# Altium PCB MADI_RP2040_PCB_L4.PcbDoc (part 2 of 3)
Units mm, origin at the board's own origin, x right, y up, seen from the top; angles counter-clockwise.
Board outline 30 x 21.59 mm, 4 copper layers (L1, L2 (GND), L3 (GND), L4), stack 1.525 mm thick; 53 components, 53 nets, 278 pads, 170 vias.
Unrouted connection lines stored in the file: 119.
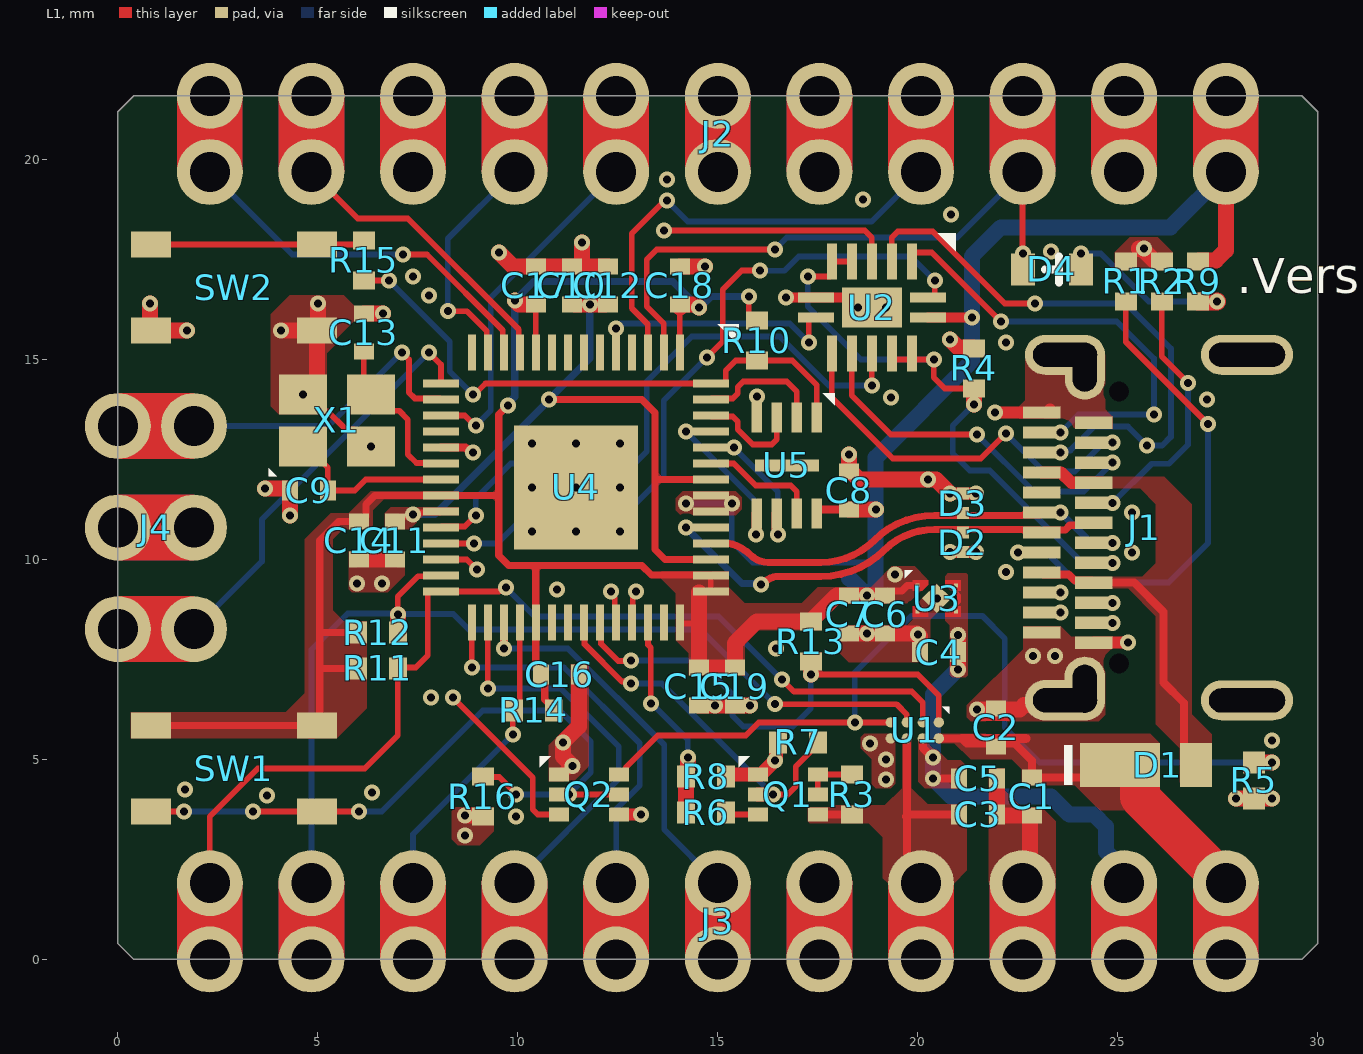
[diagram p0: L1 view]

## Via types
v1: diameter 0.4, hole 0.2, L1 to L4, tented both sides, 161 vias
v2: diameter 0.45, hole 0.2, L1 to L4, tented both sides, 9 vias

## Nets (pads, with @x,y where several pads share a name; then routed paths per layer and width w, separated by ;. In a path a pad name is that pad's centre, name@x,y a point inside that pad or via, vN(x,y) a via of type N, cw(c..) or ccw(c..) an arc to the next point about the centre after c; other vN are vias at no path point) (continued)
+3V3: (continued)
  L1 w0.18: SW1.4@0.825,5.85 SW1.3@4.975,5.85 5.05,5.925 5.05,7.25 ; R11.2@6,7.275 5.075,7.275 5.05,7.25 ; R12.2@6,8.175 5.05,8.175 ; v1(9.75,13.85) 9.525,13.625 9.525,11.625 ; R14.2@10.9,6.225 10.9,6.275 10.675,6.5 10.675,7 10.6,7.075 10.6,7.175 10.45,7.325 U4.33@10.45,8.425 10.45,9.825 10.475,9.85 ; U4.44@14.825,9.6 14.815,9.61 13.34,9.61 13.1,9.85 10.475,9.85 ; C6.2@19.175,9.1 19.285,9.21 19.596,9.21 19.736,9.35 U3.1@19.995,9.35 ; 5.05,7.25 5.05,8.175 ; 5.05,8.175 5.05,10.475 5.525,10.95 C14.2@6.025,10.95 6.075,10.95 6.201,11.077 6.201,11.376 6.425,11.6 U4.22@8.075,11.6 9.5,11.6 9.525,11.625 ; 9.525,11.625 9.525,10.1 9.775,9.85 10.475,9.85
  L1 w0.2: U5.8@17.475,11.15 17.475,11.223 17.502,11.25 C8.2@18.275,11.25
  L1 w0.25: U2.14@20.25,16.05 v1(21.35,16.05)
  L1 w0.4: v1(9.925,16.475) 10.025,16.375 C17.2@10.45,16.375 ; C18.2@14.05,16.375 14.45,16.375 v1(14.525,16.3) ; U4.43@14.525,9.175 14.525,8.4 C15.2@14.525,7.3 C19.2@15.425,7.3 15.425,7.9 15.975,8.45 R13.2@17.325,8.45 ; R13.2@17.4,8.475 17.4,8.525 17.975,9.1 v1(18.725,9.1) C6.2@19.175,9.1 ; C8.2@18.275,11.25 v1(18.95,11.25) ; R9.1@27,17.45 27.025,17.475 27.45,17.475 27.7,17.725 J2.1@27.7,19.685
  L4 w0.146: v1(14.2,11.4) v1(15.35,11.4) 15.35,10.45 15.875,9.925 18.772,9.925
  L4 w0.18: v1(9.75,13.85) 9.75,13.89 9.925,14.065 v1(9.925,16.475) 10.4,16.95 13.875,16.95 v1(14.525,16.3) 14.568,16.3 14.843,16.575 v1(15.775,16.575)
  L4 w0.4: 18.275,9.525 18.3,9.525 v1(18.725,9.1) 18.944,9.319 18.944,11.244 v1(18.95,11.25) 18.944,11.256 18.944,12.544 21.35,14.95 v1(21.35,16.05) 21.35,17.575 22.075,18.3 26.315,18.3 J2.1@27.7,19.685
  other v1: 19.425,9.625
+VBAT: C3.2 J3.4 Q1.4 R3.2 U1.C2 | length 6
  L1 w0.2: Q1.4@17.5,3.625 R3.2@18.35,3.625 ; 19.7,3.575 19.725,3.6 ; U1.C2@19.725,5.525 19.725,3.6 ; J3.4@20.08,1.905 20.08,2.297 19.725,2.652 19.725,3.6 ; C3.2@21.025,3.625 19.75,3.625 19.725,3.6
+VBUS: D1.2 J1.A4 J1.A9 J1.B4 J1.B9 | length 9.4
  L1 w0.2: J1.A4@23.094,9.681 23.147,9.628 23.769,9.628 23.924,9.473 24.342,9.473 24.394,9.421 25.409,9.421 26.144,8.686 26.144,6.921 26.65,6.415 26.65,4.83 D1.2@26.944,4.536
  L1 w0.305: J1.A9@23.1,12.175 23.579,12.175 23.839,11.915 J1.B4@24.4,11.915
+VIN_5V0: C1.2 C2.2 D1.1 J3.1 U1.A2 | length 11.2
  L1 w0.2: U1.A2@20.525,5.525 21.104,5.525 21.229,5.4 22.425,5.4 22.85,4.975 C1.2@22.85,4.55 24.825,4.55 D1.1@25.05,4.775
  L1 w0.23: 21.104,5.525 22.7,5.525
  L1 w1: D1.1@25.05,4.805 25.55,4.805 25.55,4.055 J3.1@27.7,1.905
+VSYS: C4.2 C5.2 J3.2 U1.B2 U3.3 U3.4 | length 12.9
  L1 w0.1: U3.3@20.955,8.7 20.955,8.869 21.033,8.946 21.033,9.104 20.955,9.181 U3.4@20.955,9.35
  L1 w0.2: U1.B2@20.125,5.525 20.131,5.519 20.131,5.287 v1(20.375,5.043) ; 20.6,4.525 C5.2@21.025,4.525
  L1 w0.4: v1(21,7.25) v1(21,8.109)
  L4 w0.4: v1(21,8.109) v1(21,7.25) 20.375,6.625 v1(20.375,5.043) v1(20.375,4.525) 20.825,4.075 23.328,4.075 23.786,3.617 24.408,3.617 24.702,3.323 24.702,2.701 25.16,2.243 J3.2@25.16,1.905
ADC0: J2.5 U4.38 | length 14.1
  L1 w0.146: v1(12.325,9.2) 12.325,9.132 12.425,9.032 12.425,8.45 U4.38@12.45,8.425
  L2 (GND) w0.146: v1(12.325,9.2) 12.325,9.625 13.525,10.825 13.525,16 14.368,16.843 15.043,16.843 15.65,17.45 15.65,18.125 17.21,19.685 J2.5@17.54,19.685
ADC1: J2.6 U4.39 | length 15
  L1 w0.146: U4.39@12.85,8.425 12.875,8.45 12.875,9.057 12.95,9.132 v1(12.95,9.2)
  L2 (GND) w0.146: v1(12.95,9.2) 12.95,8.663 12.862,8.575 12.025,8.575 11.65,8.95 11.65,9.95 12,10.3 12,13.35 12.85,14.2 12.85,16.425 15,18.575 J2.6@15,19.685
EN_VBAT_MON: Q1.2 R7.2 U4.36 | length 9.2
  L1 w0.146: U4.36@11.65,8.425 11.671,8.404 11.671,7.879 12.601,6.949 12.776,6.949 v1(12.825,6.9) ; v1(16.375,4.125) 16.75,4.125 16.95,4.325 16.95,4.825 17.5,5.375 R7.2@17.5,5.425
  L1 w0.35: Q1.2@16,4.125 v1(16.375,4.125)
  L4 w0.146: v1(12.825,6.9) 13.6,6.9 v1(16.375,4.125)
GND: C1.1 C2.1 C3.1 C4.1 C5.1 C6.1 C7.1 C8.1 C9.2 C10.1 C11.1 C12.1 C13.2 C14.1 C15.1 C16.1 C17.1 C18.1 C19.1 D2.2 D3.2 J1.A1 J1.A12 J1.B1 J1.B12 J1.S1 J1.S2 J1.S3 J1.S4 J2.2 J2.9 J3.3 J3.5 J4.2 Q1.1 Q2.1 Q2.4 R1.1 R2.1 R4.1 R5.1 R7.1 R8.1 R16.1 SW2.3 SW2.4 U1.D2 U2.7 U2.15 U3.2 U3.5 U4.19 U4.57 U5.4 X1.2 X1.4 | length 41
  L1 w0.146: X1.4@4.975,14.475 v1(4.625,14.125) 5.052,13.698 5.25,13.698 5.696,13.252 5.898,13.252 v1(6.325,12.825)
  L1 w0.2: U4.19@8.075,12.8 8.696,12.8 8.821,12.675 v1(8.875,12.675)
  L1 w0.25: v1(16.7,16.55) 18.6,16.55 U2.15@18.85,16.3
  L1 w0.3: Q2.1@11.025,4.625 11.1,4.625 11.293,4.818 11.343,4.818 v1(11.362,4.837) ; Q2.4@12.525,3.625 v1(13.075,3.625) ; v1(20.8,10.185) v1(21.45,10.185) ; v1(20.8,11.65) D3.2@21.125,11.65 v1(21.45,11.65) ; v1(21.925,13.675) J1.A12@23.1,13.675 ; J1.A12@23.3,13.75 J1.A12@23.302,13.748 ; J1.B12@24.4,7.915 24.402,7.917 25.242,7.917 v1(25.25,7.925)
  L1 w0.35: R8.1@15.2,4.575 15.25,4.625 16.075,4.625 v1(16.425,4.975) 16.425,4.989 16.45,5.014 16.45,5.375 R7.1@16.5,5.425
  L1 w0.4: SW2.3@0.8,15.75 v1(0.8,16.4) ; SW2.3@0.825,15.725 v1(1.725,15.725) ; v1(3.675,11.775) 4.3,11.775 C9.2@4.3,11.725 v1(4.3,11.1) ; v1(4.075,15.725) SW2.4@4.975,15.725 ; X1.4@4.975,14.475 SW2.4@4.975,15.725 ; v1(5,16.4) 5,15.75 SW2.4@4.975,15.725 ; C14.1@6.025,10 6.075,10 C11.1@6.925,10 ; C13.2@6.15,16.15 v1(6.625,16.15) ; v1(8.675,3.6) 9.1,3.6 R16.1@9.125,3.575 ; v1(9.525,17.675) 9.875,17.325 C17.1@10.45,17.325 C10.1@11.35,17.325 11.625,17.325 ; v1(11.362,4.837) 11.125,5.075 v1(11.125,5.425) 11.525,5.825 C16.1@11.525,7.125 ; v1(11.6,17.925) 11.6,17.35 11.625,17.325 ; C12.1@12.25,17.325 11.625,17.325 ; C18.1@14.05,17.325 v1(14.675,17.325) ; C15.1@14.525,6.35 v1(15.8,6.35) ; C7.1@18.275,8.15 v1(18.725,8.15) C6.1@19.175,8.15 19.961,8.15 19.986,8.125 v1(20,8.125) 20.05,8.075 C4.1@20.05,7.68 ; v1(18.275,12.625) C8.1@18.275,12.2 18.325,12.2 18.525,12 v1(20.25,12) 20.45,12 v1(20.8,11.65) ; v1(20.8,15.5) 21,15.3 21.375,15.3 R4.1@21.4,15.275 ; v1(21.475,6.25) 22.547,6.25 22.656,6.359 23.318,6.359 J1.S3@23.681,6.722 ; C3.1@21.975,3.6 C1.1@22.8,3.6 ; C3.1@21.975,3.625 C5.1@21.975,4.525 ; J3.3@22.62,1.905 22.8,2.085 C1.1@22.8,3.6 ; C1.1@22.85,3.6 C1.1@22.8,3.6 ; v1@25.525,17.775 25.535,17.765 25.61,17.765 25.925,17.45 R2.1@25.975,17.45 ; v1(27.95,4.025) v1(28.85,4.025)
  other v1: 8.675,3.1 9.95,3.575 3.725,4.1 6.35,4.175 1.675,4.25 19.2,4.5 19.2,5 18.8,5.4 28.85,5.475 14.925,6.35 7.825,6.55 22.881,7.59 23.431,7.59 16.45,7.775 20.475,9.025 10.975,9.25 5.975,9.4 6.6,9.4 22.2,9.68 25.35,10.175 25.35,11.175 27.225,14 19.325,14.05 15.975,14.075 22.2,15.425 18.5,16.3 19.2,16.3 7.775,16.6 7.375,17.075 23.325,17.7 25.65,17.775 20.825,18.625 18.625,19 13.725,19.5
  other v2: 10.35,10.7 11.45,10.7 12.55,10.7 10.35,11.8 11.45,11.8 12.55,11.8 10.35,12.9 11.45,12.9 12.55,12.9
GPIO0: D4.K J2.3 U4.2 | length 14.8
  L1 w0.146: U4.2@13.65,15.175 13.65,15.9 13.225,16.325 13.225,17.5 13.475,17.75 v1(16.425,17.75) ; v1@22.6,17.65 22.62,17.67 J2.3@22.62,19.685
  L4 w0.146: v1(16.425,17.75) 16.725,18.05 20.985,18.05 J2.3@22.62,19.685
  other v1: 22.625,17.65